# Allegro board Status Board_P1.brd
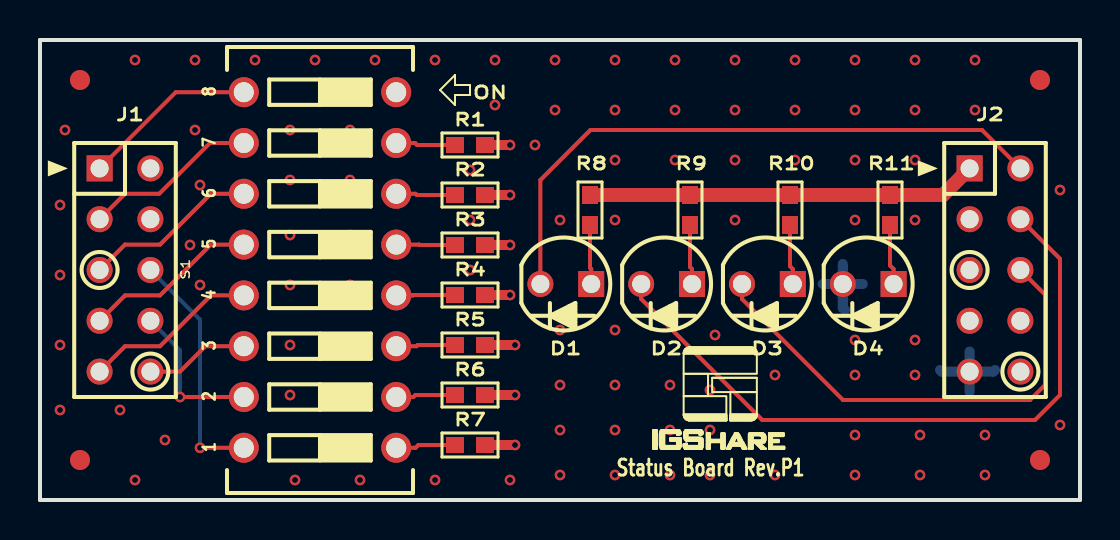
[diagram p0: board, top side]
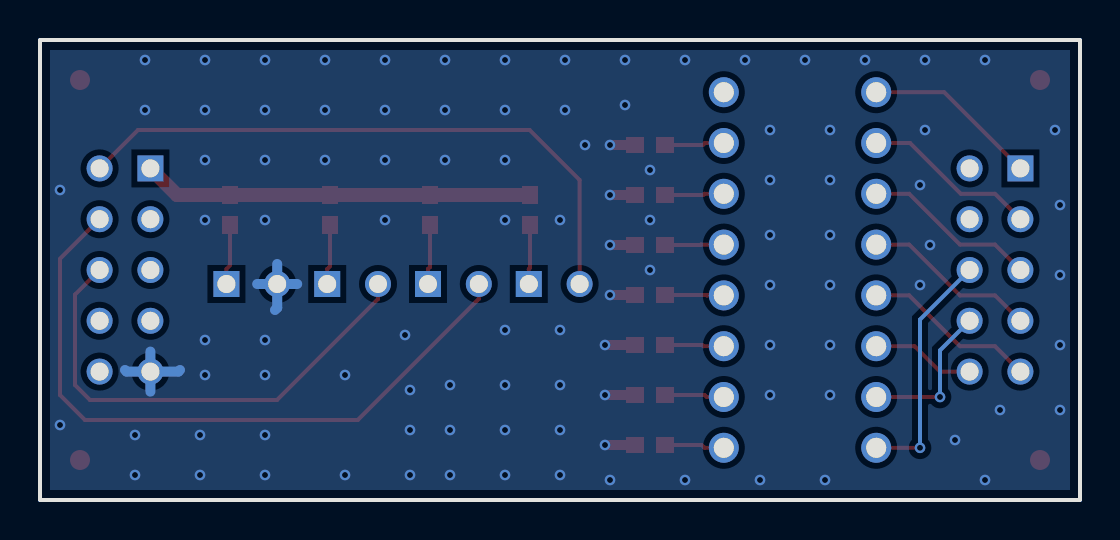
[diagram p1: board, bottom side, seen from below]

Outline 52 x 23 mm; copper layers: TOP, BOTTOM. Coordinates in mm from the lower left corner of the outline.
Outline path: 0,23 0,0 52,0 52,23 0,23

## Placement (name value [footprint] x y rotation side)
D1  TLHR4405  [LED_3MM]  26.29 10.8 270 top
D2  TLHR4405  [LED_3MM]  31.33 10.8 270 top
D3  TLHR4405  [LED_3MM]  36.37 10.8 270 top
D4  TLHR4405  [LED_3MM]  41.41 10.8 270 top
J1  -  [76342-305LF]  4.25 11.5 270 top
J2  -  [76342-305LF]  47.75 11.5 270 top
NOREF  -  [unnamed]  50 2 0 top
NOREF#2  -  [unnamed]  2 2 0 top
NOREF#3  -  [#2]  0 23 0 top
NOREF#4  -  [#2]  0 0 90 top
NOREF#5  -  [#2]  60.5 26.75 0 top
NOREF#6  -  [unnamed]  2 21 0 top
NOREF#7  -  [#2]  18.75 18.25 0 top
NOREF#8  -  [unnamed]  50 21 0 top
R1  1K  [RC1608]  21.5 17.75 0 top
R2  1K  [RC1608]  21.5 15.25 0 top
R3  1K  [RC1608]  21.5 12.75 0 top
R4  1K  [RC1608]  21.5 10.25 0 top
R5  1K  [RC1608]  21.5 7.75 0 top
R6  1K  [RC1608]  21.5 5.25 0 top
R7  1K  [RC1608]  21.5 2.75 0 top
R8  330  [RC1608]  27.5 14.5 270 top
R9  330  [RC1608]  32.5 14.5 270 top
R10  330  [RC1608]  37.5 14.5 270 top
R11  330  [RC1608]  42.5 14.5 270 top
S1  -  [LL1051-1-8]  14 11.5 90 top

## Library data of the parts
D1-D4 = _LED_3MM
J1 J2 = _76342-305LF
R1-R11 = _RC1608
S1 = _LL1051-1-8

## Footprints (pads in the part's own frame, mm; a bottom-side part is the same pattern mirrored in y, then rotated)
76342-305LF
  rect 1.3x1.3 hole 0.9: 1(-5.08,-1.27)
  round 1.3 hole 0.9: 2(-5.08,1.27) 3(-2.54,-1.27) 4(-2.54,1.27) 5(0,-1.27) 6(0,1.27) 7(2.54,-1.27) 8(2.54,1.27) 9(5.08,-1.27) 10(5.08,1.27)
LED_3MM
  rect 1.3x1.3 hole 0.9: 1(0,1.27)
  round 1.3 hole 0.9: 2(0,-1.27)
LL1051-1-8
  round 1.499 hole 1: 1(-8.89,3.81) 2(-6.35,3.81) 3(-3.81,3.81) 4(-1.27,3.81) 5(1.27,3.81) 6(3.81,3.81) 7(6.35,3.81) 8(8.89,3.81) 9(8.89,-3.81) 10(6.35,-3.81) 11(3.81,-3.81) 12(1.27,-3.81) 13(-1.27,-3.81) 14(-3.81,-3.81) 15(-6.35,-3.81) 16(-8.89,-3.81)
RC1608
  rect 0.9x0.8 smd: 1(-0.75,0) 2(0.75,0)
unnamed
  round 1 smd: (0,0)

## Nets
5VL1: J2.1 R8.1 R9.1 R10.1 R11.1
GND: D4.2 J2.9 R1.2 R2.2 R3.2 R4.2 R5.2 R6.2 R7.2
PB4: D1.2 J2.2
PB5: D2.2 J2.4
PB6: D3.2 J2.6
PF1: J1.3 S1.7
PF2: J1.5 S1.6
PF3: J1.7 S1.5
PF4: J1.9 S1.4
PF5: J1.10 S1.3
PF6: J1.8 S1.2
PF7: J1.6 S1.1
N10957707: D1.1 R8.2
N16717313: D2.1 R9.2
N16717401: D3.1 R10.2
N16717491: D4.1 R11.2
N16719047: J1.1 S1.8
N16720611: R7.1 S1.16
N16720615: R6.1 S1.15
N16720619: R5.1 S1.14
N16720623: R4.1 S1.13
N16720627: R3.1 S1.12
N16720631: R2.1 S1.11
N16720635: R1.1 S1.10

Pads without a net: J1 2 4; J2 3 5 7 8 10; S1 9

## Via types
v1: diameter 0.53, hole 0.3, TOP to BOTTOM, 105 vias

## Routing (per net, layer and track width the routed paths; a pad name or vN(x,y) marks a point on that pad's centre or on a via; arc(x,y) is an arc through that point)
5VL1: length 19.5
  TOP w0.7: R8.1 R9.1 R10.1 R11.1 45.15,15.25 J2.1
GND: length 18.7
  TOP w0.5: R6.2 v1(23.75,5.25) ; R7.2 v1(23.75,2.75) ; R5.2 v1(23.75,7.75) ; R2.2 v1(23.5,15.25) ; R4.2 v1(23.5,10.25) ; R3.2 v1(23.5,12.75) ; R1.2 v1(23.5,17.75)
  BOTTOM w0.5: 40.25,9.5 40.14,9.61 D4.2 ; J2.9 45.08,6.42 45,6.5 ; J2.9 46.48,5.42 ; J2.9 46.48,7.42 ; J2.9 47.67,6.42 47.75,6.5 ; D4.2 39.14,10.8 ; D4.2 40.14,11.8 ; D4.2 41.14,10.8
  vias: v1(1,14.75) v1(1,11.25) v1(1,7.75) v1(1,4.5) v1(1.25,18.5) v1(4,4.5) v1(4.75,22) v1(4.75,1) v1(6.25,3) v1(7.5,12.75) v1(7.75,22) v1(7.75,18.5) v1(8,15.75) v1(8,10.75) v1(10.75,22) v1(12.5,18.5) v1(12.5,16) v1(12.5,13.25) v1(12.5,10.75) v1(12.5,7.75) v1(12.5,5.25) v1(12.75,1) v1(13.75,22) v1(15.5,18.5) v1(15.5,16) v1(15.5,13.25) v1(15.5,10.75) v1(15.5,7.75) v1(15.5,5.25) v1(16,1) v1(16.75,22) v1(19.75,22) v1(19.75,1) v1(21.5,16.5) v1(21.5,14) v1(21.5,11.5) v1(22.75,22) v1(22.75,19.75) v1(23.5,1) v1(24.75,17.75) v1(25.75,22) v1(25.75,19.5) v1(26,14) v1(26,8.5) v1(26,5.75) v1(26,3.5) v1(26,1.25) v1(28.75,22) v1(28.75,19.5) v1(28.75,17) v1(28.75,14) v1(28.75,8.5) v1(28.75,5.75) v1(28.75,3.5) v1(28.75,1.25) v1(31.5,5.75) v1(31.5,3.5) v1(31.5,1.25) v1(31.75,22) v1(31.75,19.5) v1(31.75,17) v1(33.5,5.5) v1(33.5,3.5) v1(33.5,1.25) v1(33.75,8.25) v1(34.75,22) v1(34.75,19.5) v1(34.75,17) v1(34.75,14) v1(36.75,6.25) v1(36.75,1.25) v1(37.75,22) v1(37.75,19.5) v1(37.75,17) v1(40.75,22) v1(40.75,19.5) v1(40.75,17) v1(40.75,14) v1(40.75,8) v1(40.75,6.25) v1(40.75,3.25) v1(40.75,1.25) v1(43.75,22) v1(43.75,19.5) v1(43.75,17) v1(43.75,14) v1(43.75,8) v1(43.75,6.25) v1(44,3.25) v1(44,1.25) v1(46.75,22) v1(46.75,19.5) v1(47.25,3.25) v1(47.25,1.25) v1(51,15.5) v1(51,3.75)
PB4: length 31
  TOP w0.2: J2.2 47.1,18.5 27.52,18.5 25.02,16 D1.2
PB5: length 34.3
  TOP w0.2: J2.4 51,12.06 51,5.25 49.75,4 36.11,4 30.06,10.05 D2.2
PB6: length 24.6
  TOP w0.2: J2.6 50.25,10.27 50.25,5.75 49.5,5 40.15,5 35.1,10.05 D3.2
PF1: length 8.8
  TOP w0.2: J1.3 4.25,15.31 5.96,15.31 8.5,17.85 S1.7
PF2: length 8.8
  TOP w0.2: J1.5 4.25,12.77 6,12.77 8.54,15.31 S1.6
PF3: length 8.8
  TOP w0.2: J1.7 4.25,10.23 6,10.23 8.54,12.77 S1.5
PF4: length 8.8
  TOP w0.2: J1.9 4.25,7.69 6,7.69 8.54,10.23 S1.4
PF5: length 5.2
  TOP w0.2: J1.10 7,6.42 8.27,7.69 S1.3
PF6: length 7.6
  TOP w0.2: S1.2 v1(7,5.15)
  BOTTOM w0.2: v1(7,5.15) 7,7.48 J1.8
PF7: length 12.1
  TOP w0.2: S1.1 v1(8,2.61)
  BOTTOM w0.2: J1.6 8,9.02 v1(8,2.61)
N10957707: length 3
  TOP w0.2: D1.1 27.56,11.55 27.5,11.61 R8.2
N16717313: length 3
  TOP w0.2: D2.1 32.6,11.55 32.5,11.65 R9.2
N16717401: length 3
  TOP w0.2: R10.2 37.5,11.69 37.64,11.55 D3.1
N16717491: length 3
  TOP w0.2: D4.1 42.68,11.55 42.5,11.73 R11.2
N16719047: length 8.8
  TOP w0.2: J1.1 6.79,20.39 S1.8
N16720611: length 3
  TOP w0.2: S1.16 18.78,2.61 18.92,2.75 R7.1
N16720615: length 3
  TOP w0.2: S1.15 18.66,5.15 18.76,5.25 R6.1
N16720619: length 3
  TOP w0.2: R5.1 18.89,7.75 18.83,7.69 S1.14
N16720623: length 3.5
  TOP w0.2: 18.13,10.23 18.66,10.23 18.68,10.25 ; 18.13,10.23 18.13,10.25 18.68,10.25 ; 18.13,10.23 S1.13 ; 18.68,10.25 R4.1
N16720627: length 2.9
  TOP w0.2: S1.12 18.96,12.77 18.98,12.75 R3.1
N16720631: length 3
  TOP w0.2: R2.1 18.84,15.25 18.78,15.31 S1.11
N16720635: length 3
  TOP w0.2: S1.10 18.75,17.85 18.85,17.75 R1.1

## Copper pours and planes (outline as drawn; the poured copper is in the pictures)
GND on BOTTOM: 0.5,0.5 0.5,22.5 51.5,22.5 51.5,0.5

## Text on the board
Ref Des/Silkscreen Top: Status Board Rev.P1 | ON
NCLEGEND-1-2: FIGURE | SIZE | 0.30 | 0.90 | 1.00 | DRILL CHART: TOP to BOTTOM | ALL UNITS ARE IN MILLIMETERS | PLATED | QTY | 105 | 28 | 16
